# Altium PCB USBPcb.PcbDoc
Units mm, origin at the board's own origin, x right, y up, seen from the top; angles counter-clockwise.
Board outline 12.06 x 27.73 mm, 2 copper layers (Top Layer, Bottom Layer), stack 0.781 mm thick; 4 components, 9 nets, 30 pads, 18 vias.
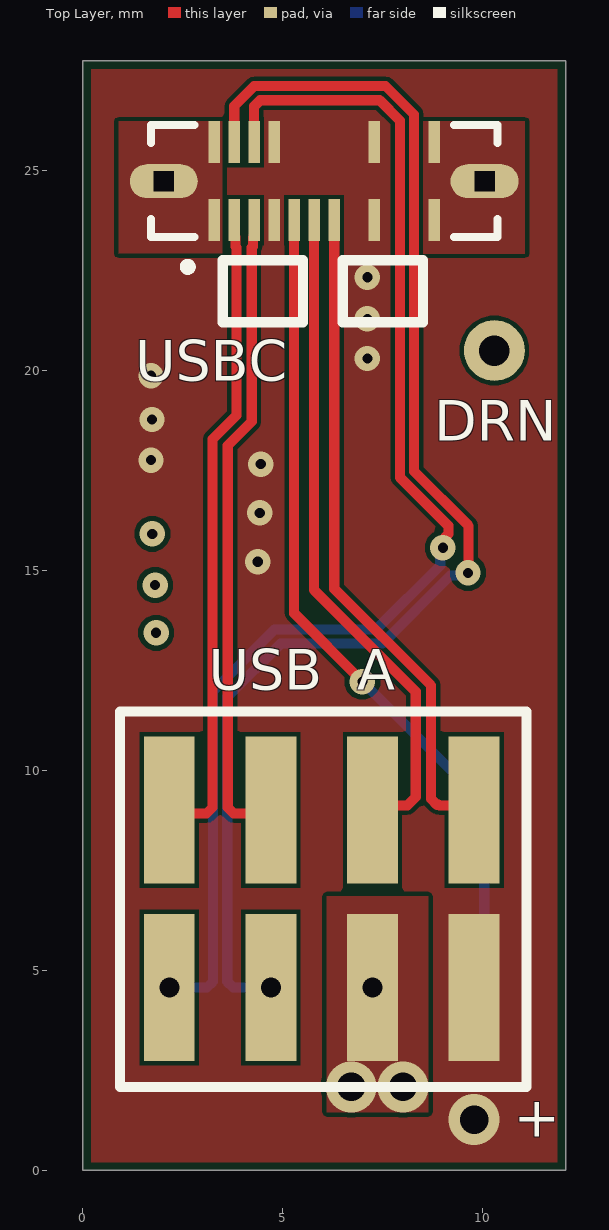
[diagram p0: Top Layer view]
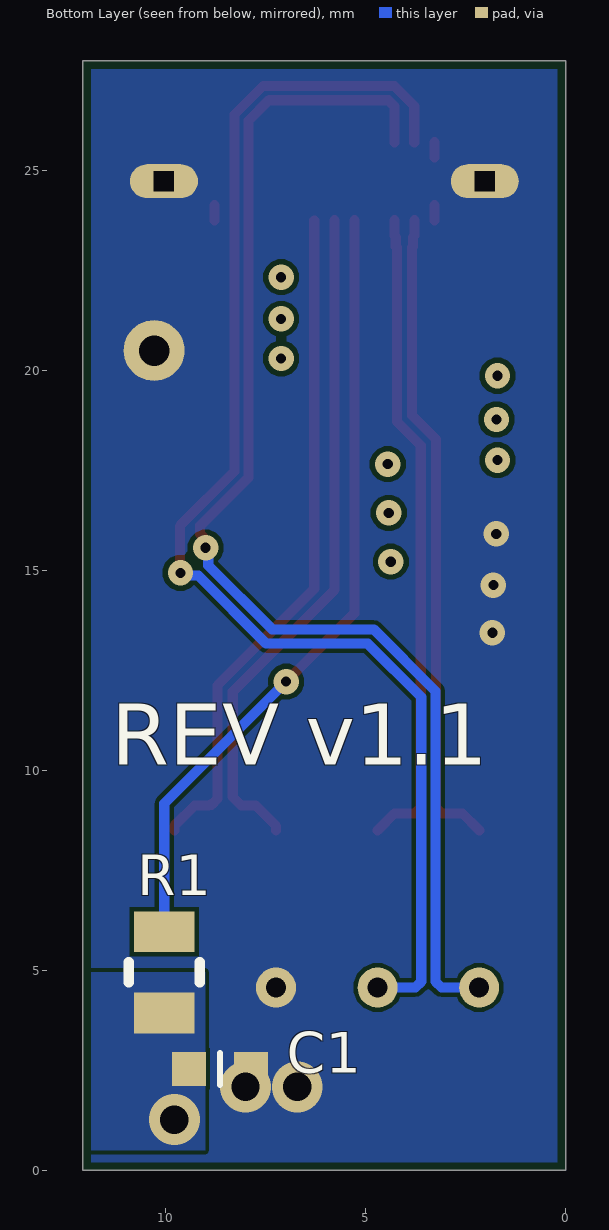
[diagram p1: Bottom Layer view, seen from below]

## Layer stack, top to bottom
Top Solder: solder mask 0.0254, SM-001, Dk 4
Top Layer: signal copper 0.035
Dielectric 3: core 0.7112, Core-039, Dk 4.8
Bottom Layer: signal copper 0.035
Bottom Solder: solder mask 0.0254, SM-001, Dk 4

## Board outline
0,27.733 12.065,27.733 12.065,0 0,0

## Design rules (kind name [scope] priority, off if disabled: settings)
BoardOutlineClearance [All] p1: gap=0.2 ignorepadtopadclearanceinfootprint=FALSE
Clearance [All] p1: gap=0.102 ignorepadtopadclearanceinfootprint=FALSE except(0.127: Arc-Via Track-Via SMDPad-Via THPad-Via Via-Via Via-Fill Via-Poly Via-Region Via-Text; 0.25: Arc-Hole Track-Hole SMDPad-Hole THPad-Hole Via-Hole Fill-Hole Poly-Hole Region-Hole Text-Hole)
ComponentClearance [All] p1: gap=0.102 collisioncheckmode=3 verticalgap=0.102 showdistances=TRUE
DiffPairsRouting [All] p1: maxlimit=0.102 minlimit=0.102 mostfreqgap=0.102 toplayer_minwidth=0.102 toplayer_maxwidth=1816.048 toplayer_prefwidth=0.102 bottomlayer_minwidth=0.102 bottomlayer_maxwidth=1816.048 bottomlayer_prefwidth=0.102 maxuncoupledlength=12.7
Height [All] p1: minheight=0 maxheight=1816.048 prefheight=12.7
HoleSize [All] p1: absolutevalues=TRUE maxlimit=6.3 minlimit=0.2 maxpercent=80.000 minpercent=20.000
HoleToHoleClearance [All] p1: gap=0.25 allowstackedmicrovias=FALSE
MinimumAnnularRing [All] p1: minimumring=0.076
MinimumSolderMaskSliver [All] p1: minsoldermaskwidth=0
PlaneClearance [All] p1: clearance=0.102
PlaneConnect PlaneConnectPowerPads [InPadClass('PowerPads')] p1: planeconnectstyle=Direct reliefexpansion=0.508 reliefentries=4 reliefconductorwidth=0.254 reliefairgap=0.254
PlaneConnect [All] p2: pad.planeconnectstyle=Relief pad.reliefexpansion=0.3 pad.reliefentries=4 pad.reliefconductorwidth=0.102 pad.reliefairgap=0.102 via.planeconnectstyle=Direct via.reliefexpansion=0.3 via.reliefentries=4 via.reliefconductorwidth=0.127 via.reliefairgap=0.127
PolygonConnect PolygonConnectPowerPads [All vs (InPadClass('PowerPads'))] p1: connectstyle=Direct reliefconductorwidth=0.254 reliefentries=4 polygonreliefangle="90 Angle" airgapwidth=0.254
PolygonConnect [All] p2: connectstyle=Direct reliefconductorwidth=0.102 reliefentries=4 polygonreliefangle="90 Angle" airgapwidth=0.102
RoutingVias [All] p1: holewidth=0.2 width=0.45 viastyle="Through Hole" minholewidth=0.2 minwidth=0.45 maxholewidth=6.3 maxwidth=6.55
SilkToSilkClearance [All] p1: silktosilkclearance=0
SilkToSolderMaskClearance [IsPad] p1: minsilkscreentomaskgap=0.102 clearancetoexposedcopper=TRUE
SolderMaskExpansion [All] p1: expansion=0.075 istentingtop=FALSE
Width [All] p1: maxlimit=1816.048 minlimit=0.102 preferedwidth=0.102
20 further rules are at their usual default settings.

## Classes and differential pairs
differential pair D: +D_P -D_N
differential pair SSTX: +SSTX_P -SSTX_N
differential pair SSRX: +SSRX_P -SSRX_N

## Components (designator, comment, footprint, x,y, rotation, side; value= is the part's Value field where it differs from the comment)
C1 "1000pF" SMD-0603C 8.636,2.536 r90 bottom
R1 "56k" SMD-0805-RES 10.033,4.949 r0 bottom
"USB  A" "Molex 0015910080" "Molex 0015910080" 11.087,11.48 r180 top locked (schematic designator "USB A")
USBC "USB4151-GF-C_REVA_NOLEGS_MISSINGPINS" GCT_USB4151-GF-C_REVA_NOLEGS_MISSINGPINS 6.03,24.726 r180 top

## Footprints (in the part's own frame and the unit in brackets; to place one, negate y for a bottom-side part, rotate by r counter-clockwise, add the part's x,y. Pads: shape width x height; smd on the part's side, far side on the other; paste and mask are expansions set on the pad)
GCT_USB4151-GF-C_REVA_NOLEGS_MISSINGPINS [mm] "Has no mounting legs (long sides) and also has unused pins removed (for camera PCB)"
  rect 0.28x1.05 smd: A1(2.75,0.975) A2(2.25,0.975) A3(1.75,0.975) A4(1.25,0.975) A5(0.75,0.975) A6(0.25,0.975) A7(-0.25,0.975) A9(-1.25,0.975) A12(-2.75,0.975) B1(-2.75,-0.975) B4(-1.25,-0.975) B9(1.25,-0.975) B10(1.75,-0.975) B11(2.25,-0.975) B12(2.75,-0.975)
  oval 1.7x0.85 hole 0.5 square: S1(-4.01,0) S4(4.01,0)
  silkscreen extent -4.33,-1.4 4.33,2.24, body extent -4.33,-2.88 4.33,2.88, height 11.1
"Molex 0015910080" [mm]
  rect 1.27x3.68 smd: 1(1.308,6.912) 5(1.308,2.472) 6(3.848,2.472) 7(6.388,2.472) 8(8.928,2.472)
  rect 1.27x3.68 / inner rect 1.27x3.68 / far side round 1 hole 0.5: 2(3.848,6.912) 3(6.388,6.912) 4(8.928,6.912)
  silkscreen extent 0,0.01 10.16,9.4, body extent 0,1.14 10.16,8.13, height 9.68
SMD-0603C [mm]
  rect 0.85x0.85 smd: 1(0,0.775) 2(0,-0.775)
  silkscreen extent -0.4,0 0.4,0, body extent -0.4,-0.8 0.4,0.8, height 0.9
SMD-0805-RES [mil]
  rect 60x40 smd: 1(0,40) 2(0,-40)
  silkscreen extent -35,-10 35,10, body extent -24,-39 26,39, height 31

## Part data
C1: library part GRM188R71C102KA01D, "Capacitor used for bypass between GND and VBUS", Digi-Key Part Number=490-11509-1-ND, Manufacturer="Murata Electronics North America", Operating Temperature="-55°C ~ 125°C", Tolerance=±10%, Datasheets=http://www.murata.com/~/media/webrenewal/support/library/catalog/products/capacitor/mlcc/c02e.pdf, Manufacturer Part Number=GRM188R71C102KA01D, Quantity Available=39666, Size / Dimension="0.063\" L x 0.031\" W (1.60mm x 0.80mm)", Total Price (USD)=0.2, Total Quantity=2, Unit Price (USD)=0.1
R1: library part ERJ-6GEYJ563V, "Connects pin A5 on USBC to VBUS", Digi-Key Part Number=P56KACT-ND, Manufacturer="Panasonic Electronic Components", Operating Temperature="-55°C ~ 155°C", Tolerance=±5%, Datasheets=http://industrial.panasonic.com/www-cgi/jvcr13pz.cgi?E+PZ+3+AOA0001+ERJ6GEYJ563V+7+WW, Manufacturer Part Number=ERJ-6GEYJ563V, Quantity Available=43472, Size / Dimension="0.079\" L x 0.049\" W (2.00mm x 1.25mm)", Total Price (USD)=0.00992, Total Quantity=2, Unit Price (USD)=0.00496
"USB  A": "USB A header", Digi-Key Part Number=WM17458-ND, Manufacturer=Molex, Manufacturer Part Number=0015910080, Datasheets=https://www.molex.com/pdm_docs/sd/015910080_sd.pdf, Quantity Available=20779, Total Price (USD)=2.44, Total Quantity=2, Unit Price (USD)=1.22
USBC: "USB Type C 3.1 vertical surface mount connector", Package=None, Availability=Unavailable, MF="Global Connector Technology", MP=USB4151-GF-C, Price=None, SnapEDA_Link=https://www.snapeda.com/parts/USB4151-GF-C/Global%20Connector%20Technology/view-part/4594022/?ref=snap

## Free pads (board coordinates)
  round 1.524 hole 0.762: 2(10.287,20.494)

## Via types
v1: diameter 0.635, hole 0.254, Top Layer to Bottom Layer, 15 vias
v2: diameter 1.27, hole 0.711, Top Layer to Bottom Layer, 3 vias

## Nets (pads, with @x,y where several pads share a name; then routed paths per layer and width w, separated by ;. In a path a pad name is that pad's centre, name@x,y a point inside that pad or via, vN(x,y) a via of type N, cw(c..) or ccw(c..) an arc to the next point about the centre after c; other vN are vias at no path point)
CC1: R1.2 USBC.A5 | length 19.8
  Top Layer w0.254: USBC.A5 5.28,13.922 v1(6.985,12.217)
  Bottom Layer w0.254: v1(6.985,12.217) 10.033,9.169 R1.2
D_N: "USB  A.5" USBC.A7 | length 16.9
  Top Layer w0.254: USBC.A7@6.284,23.747 6.284,22.672 6.284,14.538 8.7,12.123 8.7,9.289 8.848,9.14 8.89,9.14 8.912,9.118 9.271,9.118 9.779,8.61 9.779,8.5
D_P: "USB  A.6" USBC.A6 | length 17
  Top Layer w0.254: USBC.A6 5.78,14.503 8.319,11.965 8.319,9.33 8.106,9.118 7.747,9.118 7.239,8.61 7.239,8.5
GND: "USB  A.2" C1.2 pad.2 USBC.A1 USBC.A12 USBC.B1 USBC.B12 USBC.S1 USBC.S4 | length 1.8
  Top Layer w0.254: USBC.S4@2.134,24.612 USBC.S4 USBC.S4@2.134,24.84 ; USBC.A1 USBC.A1@3.28,24.136 ; USBC.B12@3.28,25.316 USBC.B12 ; USBC.A12 USBC.A12@8.78,24.136 ; USBC.S1@9.926,24.612 USBC.S1 USBC.S1@9.926,24.84
  other v1: 1.829,13.437 1.803,14.63 1.734,15.909
  other v2: 6.706,2.083 8.001,2.083
SSRX_N: "USB  A.7" USBC.A3 | length 16.3
  Top Layer w0.254: USBC.A3 4.28,23.366 4.247,23.333 4.247,23.091 4.218,23.062 4.218,18.718 3.619,18.12 3.619,9.068 3.768,8.919 4.28,8.919 4.699,8.5
SSRX_P: "USB  A.8" USBC.A2 | length 16.3
  Top Layer w0.254: 2.159,8.5 2.578,8.919 3.09,8.919 3.238,9.068 3.238,18.277 3.837,18.876 3.837,23.067 3.813,23.091 3.813,23.333 3.78,23.366 USBC.A2
SSTX_N: "USB  A.4" USBC.B10 | length 31.9
  Top Layer w0.254: USBC.B10 4.28,26.603 4.429,26.752 7.416,26.752 7.922,26.246 7.922,17.327 9.136,16.114 9.136,15.903 9.071,15.838 9.071,15.637 v1(8.998,15.564)
  Bottom Layer w0.254: 2.159,4.568 3.102,4.568 3.251,4.717 3.251,11.978 4.796,13.523 7.334,13.523 8.932,15.121 8.932,15.498 v1(8.998,15.564)
SSTX_P: "USB  A.3" USBC.B11 | length 33.5
  Top Layer w0.254: USBC.B11 3.781,25.702 3.781,26.607 4.281,27.107 7.564,27.107 8.278,26.393 8.278,17.474 9.641,16.111 9.641,14.95 v1(9.627,14.935)
  Bottom Layer w0.254: 4.699,4.568 3.756,4.568 3.607,4.717 3.607,11.831 4.943,13.167 7.481,13.167 9.184,14.869 9.561,14.869 v1(9.627,14.935)
VBUS: "USB  A.1" C1.1 R1.1 USBC.A4 USBC.A9 USBC.B4 USBC.B9
  other v1: 4.369,15.215 4.42,16.434 4.445,17.653 1.702,17.755 1.727,18.771 1.702,19.863 7.112,20.295 7.112,21.285 7.112,22.327
  other v2: 9.779,1.266

## Polygon pours and split planes (outlines as drawn)
GND on Bottom Layer "GND_L02_P011" (solid, remove dead copper, pour order 11): -0.025,27.737 12.065,27.737 12.065,0 0.051,0
VBUS on Bottom Layer "VBUS_L02_P005" (solid, pour order 5): 9.013,0.504 11.934,0.504 11.934,4.949 9.013,4.949
VBUS on Top Layer "VBUS_L01_P009" (solid, remove dead copper, pour order 9): 0,27.733 12.065,27.733 12.065,0 0,0
GND on Top Layer "GND_L01_P006" (solid, pour order 6): 0.889,22.918 0.892,22.921 3.482,22.921 3.482,26.219 3.481,26.22 0.889,26.22
GND on Top Layer "GND_L01_P007" (solid, pour order 7): 8.509,26.22 8.509,22.918 11.049,22.918 11.049,26.22
GND on Top Layer "GND_L01_P002" (solid, pour order 2): 6.092,6.854 8.632,6.854 8.632,1.448 6.092,1.448

## Silkscreen, mask and mechanical layers (free items; w line width, h text height)
Top Overlay:
  lines w0.254: 3.493,21.201 5.5,21.201 5.5,22.75 3.493,22.75 3.493,21.201 ; 6.493,21.201 8.5,21.201 8.5,22.75 6.493,22.75 6.493,21.201
  text "DRN" at 8.788,18.233 h1.02
  text "+" at 10.77,0.843 h1.02
Bottom Overlay:
  text "REV v1.1" at 11.354,10.135 h1.52
Mechanical 1:
  the board outline again, w0

## Dimensions
0,27.733 to 12.065,27.733 on Mechanical 1
0,27.733 to 0,0 on Mechanical 1